# Altium PCB TestPCB.PcbDoc
Units mm, origin at the board's own origin, x right, y up, seen from the top; angles counter-clockwise.
Board outline 90 x 90 mm, 2 copper layers (Top Layer, Bottom Layer); 125 components, 111 nets, 387 pads, 0 vias.
Unrouted connection lines stored in the file: 262.
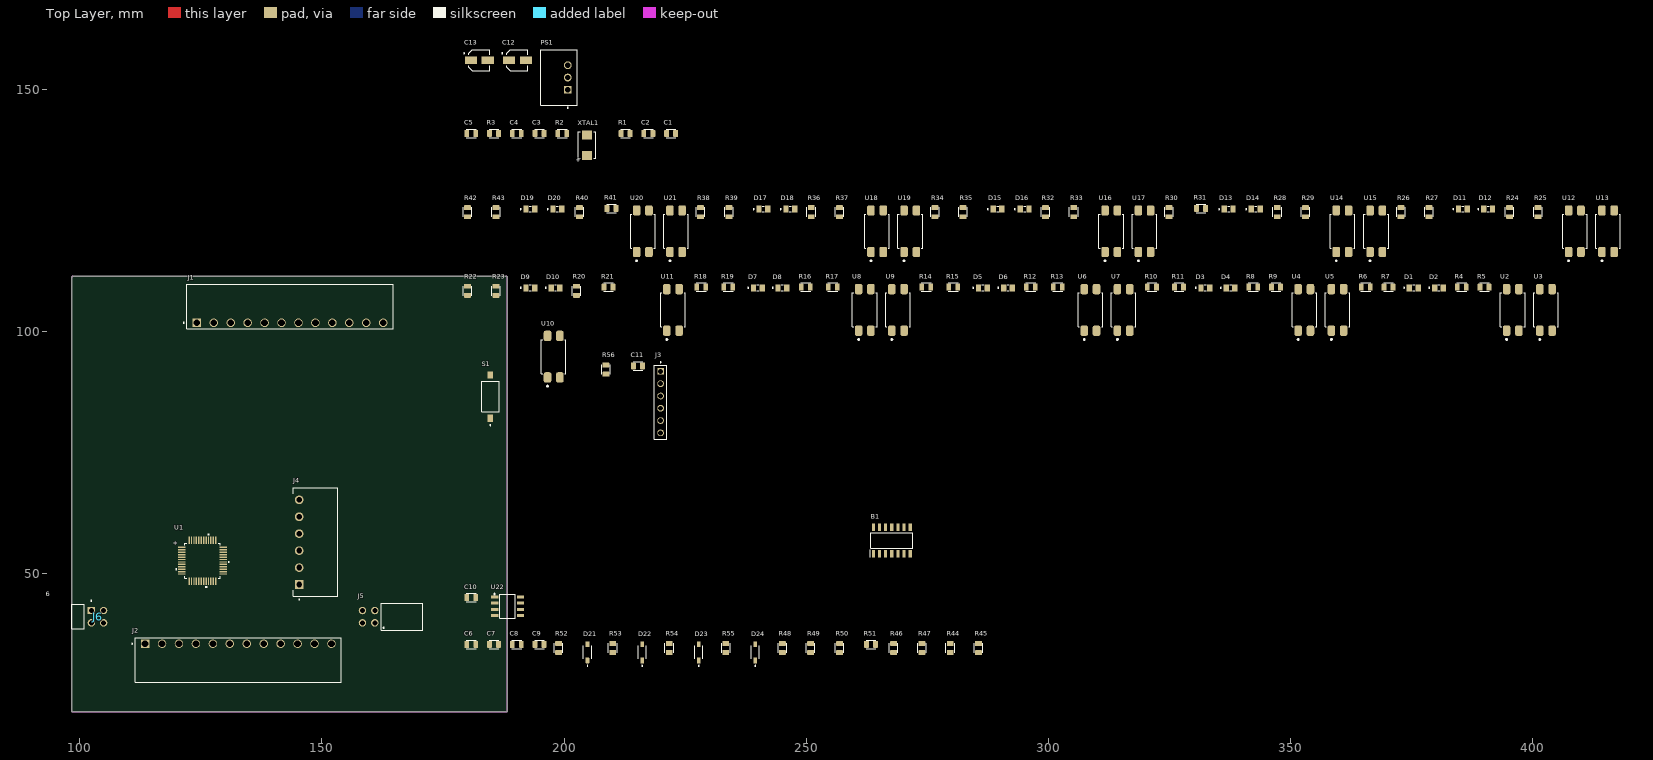
[diagram p0: Top Layer view]
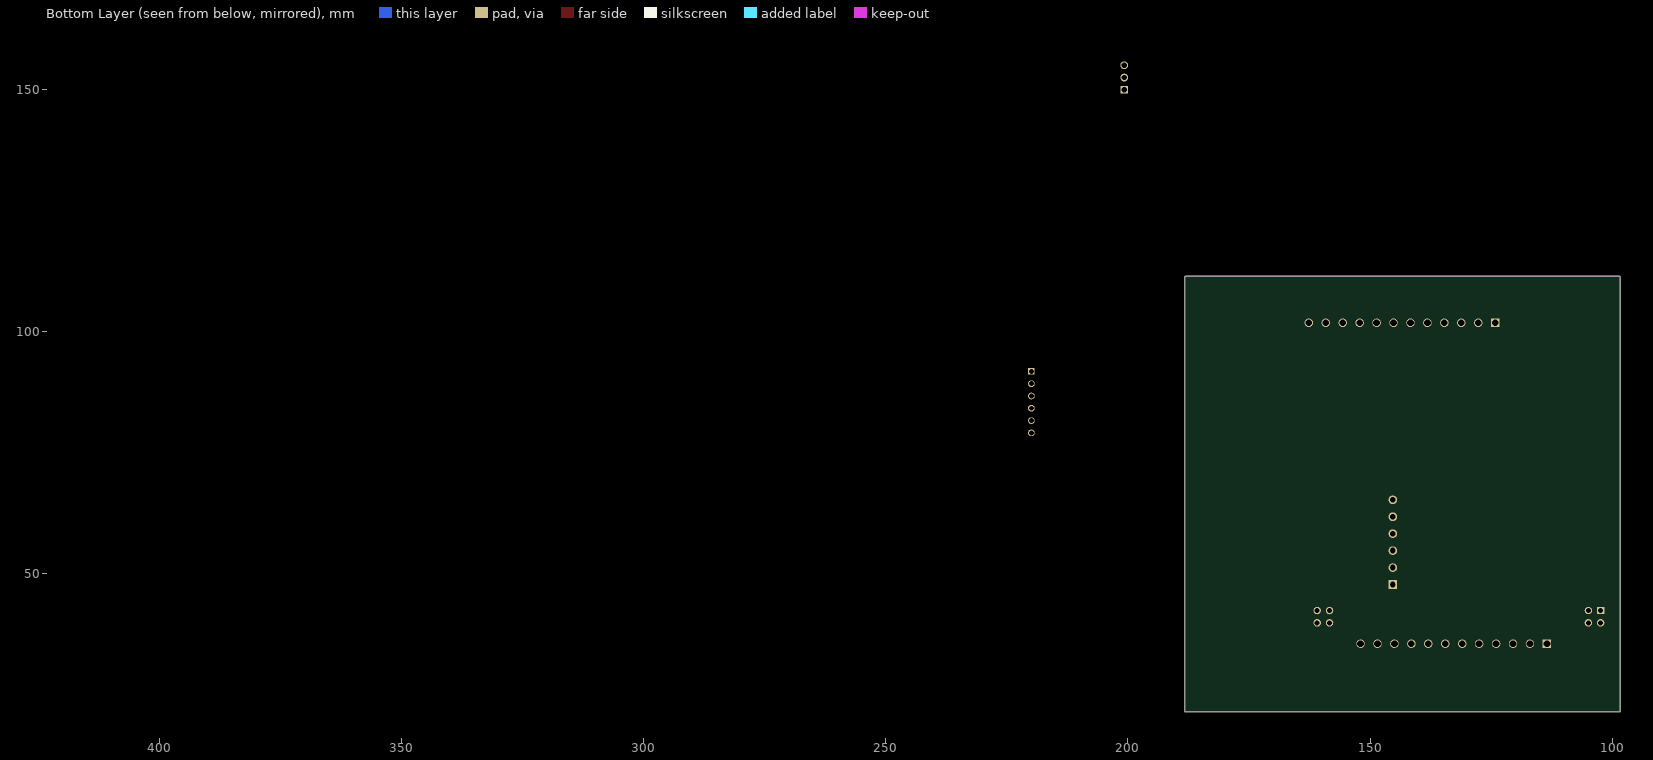
[diagram p1: Bottom Layer view, seen from below]

## Layer stack, top to bottom
Top Solder: solder mask 0.0102, Solder Resist, Dk 3.5
Top Layer: signal copper 0.0356
Dielectric 1: dielectric 0.32, FR-4, Dk 4.8
Bottom Layer: signal copper 0.0356
Bottom Solder: solder mask 0.0102, Solder Resist, Dk 3.5

## Board outline
98.298,21.717 98.298,111.209 cw(c98.552,111.209) 98.552,111.463 188.044,111.463 cw(c188.044,111.209) 188.298,111.209 188.298,21.717 cw(c188.044,21.717) 188.044,21.463 98.552,21.463 cw(c98.552,21.717)

## Design rules (kind name [scope] priority, off if disabled: settings)
Clearance [All] p1: gap=0.2 ignorepadtopadclearanceinfootprint=TRUE
DiffPairsRouting [All] p1: maxlimit=0.254 minlimit=0.254 mostfreqgap=0.254 toplayer_minwidth=0.381 toplayer_maxwidth=0.381 toplayer_prefwidth=0.381 bottomlayer_minwidth=0.381 bottomlayer_maxwidth=0.381 bottomlayer_prefwidth=0.381 maxuncoupledlength=12.7
HoleSize [All] p1: absolutevalues=TRUE maxlimit=6.3 minlimit=0.3 maxpercent=80.000 minpercent=20.000
HoleToHoleClearance [All] p1: gap=0.5 allowstackedmicrovias=TRUE
PolygonConnect [All] p1: connectstyle=Relief reliefconductorwidth=0.254 reliefentries=4 polygonreliefangle="90 Angle" airgapwidth=0.254
RoutingVias [All] p1: holewidth=0.711 width=1.27 viastyle="Through Hole" minholewidth=0.3 minwidth=0.5 maxholewidth=6.3 maxwidth=10
SilkToSilkClearance [All] p1: silktosilkclearance=0
SolderMaskExpansion [All] p1: expansion=0.102 istentingtop=FALSE
UnRoutedNet [All] p1: checkbadconnections=TRUE
Width [All] p1: maxlimit=5 minlimit=0.127 preferedwidth=0.5 minimp=50.000000 maximp=50.000000 favimp=50.000000
25 further rules are at their usual default settings.

## Classes and differential pairs
net class DO[9..0]: DO0 DO1 DO2 DO3 DO4 DO5 DO6 DO7 DO8 DO9
net class DI[9..0]: DI0 DI1 DI2 DI3 DI4 DI5 DI6 DI7 DI8 DI9
net class CDO[9..0]: CDO0 CDO1 CDO2 CDO3 CDO4 CDO5 CDO6 CDO7 CDO8 CDO9
net class CDI[9..0]: CDI0 CDI1 CDI2 CDI3 CDI4 CDI5 CDI6 CDI7 CDI8 CDI9
net class CAI[3..0]: CAI0 CAI1 CAI2 CAI3
net class ADC[2..0]: ADC0 ADC1 ADC2
component class Power: C12 C13 PS1
component class PIC18F56Q83: C1 C2 C3 C4 C5 R1 R2 R3 U1 XTAL1
component class "Digital Outputs": D11 D12 D13 D14 D15 D16 D17 D18 D19 D20 R24 R25 R26 R27 R28 R29 R30 R31 R32 R33 R34 R35 R36 R37 R38 R39 R40 R41 R42 R43 U12 U13 U14 U15 U16 U17 U18 U19 U20 U21
component class "Digital Inputs": D1 D2 D3 D4 D5 D6 D7 D8 D9 D10 R4 R5 R6 R7 R8 R9 R10 R11 R12 R13 R14 R15 R16 R17 R18 R19 R20 R21 R22 R23 U2 U3 U4 U5 U6 U7 U8 U9 U10 U11
component class Connectors: C11 J1 J2 J3 J4 J5 J6 R56 S1
component class "CAN Communication": C10 U22
component class "Analog Inputs": B1 C6 C7 C8 C9 D21 D22 D23 D24 R44 R45 R46 R47 R48 R49 R50 R51 R52 R53 R54 R55
differential pair CAN: +CAN_P -CAN_N

## Components (designator, comment, footprint, x,y, rotation, side; value= is the part's Value field where it differs from the comment)
B1 "OPA4991QDRQ1" OPA4991QDRQ1 267.716,56.896 r90 top
C1 "0.1uF" 0805 222.123,140.97 r0 top
C2 "20pF" 0805 217.424,140.97 r0 top
C3 "20pF" 0805 194.945,140.97 r0 top
C4 "0.1uF" 0805 190.246,140.97 r0 top
C5 "0.1uF" 0805 180.848,140.97 r0 top
C6 "0.1uF" 0805 180.848,35.433 r0 top
C7 "0.1uF" 0805 185.547,35.433 r0 top
C8 "0.1uF" 0805 190.246,35.433 r0 top
C9 "0.1uF" 0805 194.945,35.433 r0 top
C10 "0.1uF" 0805 180.848,45.085 r0 top
C11 "0.1uF" 0805 215.265,92.964 r0 top
C12 "47uF 4x5.4" "Electrolytic 4x5.4" 190.373,156.083 r0 top
C13 "47uF 4x5.4" "Electrolytic 4x5.4" 182.499,156.083 r0 top
D1 "LED 0805" "LED 0805" 375.539,109.093 r0 top
D2 "LED 0805" "LED 0805" 380.746,109.093 r0 top
D3 "LED 0805" "LED 0805" 332.486,109.093 r0 top
D4 "LED 0805" "LED 0805" 337.693,109.093 r0 top
D5 "LED 0805" "LED 0805" 286.512,109.093 r0 top
D6 "LED 0805" "LED 0805" 291.719,109.093 r0 top
D7 "LED 0805" "LED 0805" 240.03,109.093 r0 top
D8 "LED 0805" "LED 0805" 245.11,109.093 r0 top
D9 "LED 0805" "LED 0805" 193.04,109.093 r0 top
D10 "LED 0805" "LED 0805" 198.247,109.093 r0 top
D11 "LED 0805" "LED 0805" 385.699,125.349 r0 top
D12 "LED 0805" "LED 0805" 390.906,125.349 r0 top
D13 "LED 0805" "LED 0805" 337.312,125.349 r0 top
D14 "LED 0805" "LED 0805" 342.9,125.349 r0 top
D15 "LED 0805" "LED 0805" 289.56,125.349 r0 top
D16 "LED 0805" "LED 0805" 295.148,125.349 r0 top
D17 "LED 0805" "LED 0805" 241.173,125.349 r0 top
D18 "LED 0805" "LED 0805" 246.761,125.349 r0 top
D19 "LED 0805" "LED 0805" 193.04,125.349 r0 top
D20 "LED 0805" "LED 0805" 198.628,125.349 r0 top
D21 "5Vz" SOD123 204.851,33.782 r90 top
D22 "5Vz" SOD123 216.154,33.782 r90 top
D23 "5Vz" SOD123 227.838,33.782 r90 top
D24 "5Vz" SOD123 239.522,33.782 r90 top
J1 "12P - Right 3.5mm Industrial Connector" "12P - Right 3.5mm Industrial Connector" 124.146,101.854 r0 top
J2 "12P - Right 3.5mm Industrial Connector" "12P - Right 3.5mm Industrial Connector" 113.463,35.56 r0 top
J3 "6-POS 2.54mm Straight Header" "6-POS 2.54mm Header" 219.964,85.471 r90 top
J4 "6P - Right 3.5mm Industrial Connector" "6P - Right 3.5mm Industrial Connector" 153.288,45.343 r90 top
J5 "2x4-POS 2.54mm Female Header" "2x4-POS 2.54mm Female Header" 159.639,41.148 r90 top
J6 "2x4-POS 2.54mm Male Header" "2x4-POS 2.54mm Male Header" 103.632,41.148 r270 top
PS1 "R-78K5.0-0.5" CONV_R-78K5.0-0.5 199.009,152.527 r90 top
R1 "0805_Resistor" 0805 212.725,140.97 r0 top
R2 "10k" 0805 199.644,140.97 r0 top
R3 "100R" 0805 185.547,140.97 r0 top
R4 "1k" 0805 385.445,109.22 r0 top
R5 "1k" 0805 390.144,109.22 r0 top
R6 "1k" 0805 365.633,109.22 r0 top
R7 "1k" 0805 370.332,109.22 r0 top
R8 "1k" 0805 342.392,109.22 r0 top
R9 "1k" 0805 347.091,109.22 r0 top
R10 "1k" 0805 321.437,109.22 r0 top
R11 "1k" 0805 327.025,109.22 r0 top
R12 "1k" 0805 296.418,109.22 r0 top
R13 "1k" 0805 302.006,109.22 r0 top
R14 "1k" 0805 274.828,109.22 r0 top
R15 "1k" 0805 280.416,109.22 r0 top
R16 "1k" 0805 249.936,109.22 r0 top
R17 "1k" 0805 255.524,109.22 r0 top
R18 "1k" 0805 228.346,109.22 r0 top
R19 "1k" 0805 233.934,109.22 r0 top
R20 "1k" 0805 202.565,108.458 r90 top
R21 "1k" 0805 209.169,109.22 r0 top
R22 "1k" 0805 180.086,108.458 r90 top
R23 "1k" 0805 185.928,108.458 r90 top
R24 "220R" 0805 395.351,124.714 r90 top
R25 "220R" 0805 401.193,124.714 r90 top
R26 "1k" 0805 372.872,124.714 r90 top
R27 "1k" 0805 378.714,124.714 r90 top
R28 "220R" 0805 347.345,124.714 r90 top
R29 "220R" 0805 353.187,124.714 r90 top
R30 "1k" 0805 324.993,124.714 r90 top
R31 "1k" 0805 331.597,125.476 r0 top
R32 "220R" 0805 299.466,124.714 r90 top
R33 "220R" 0805 305.308,124.714 r90 top
R34 "1k" 0805 276.606,124.714 r90 top
R35 "1k" 0805 282.448,124.714 r90 top
R36 "220R" 0805 251.079,124.714 r90 top
R37 "220R" 0805 256.921,124.714 r90 top
R38 "1k" 0805 228.219,124.714 r90 top
R39 "1k" 0805 234.061,124.714 r90 top
R40 "220R" 0805 203.2,124.714 r90 top
R41 "220R" 0805 209.804,125.476 r0 top
R42 "1k" 0805 180.086,124.714 r90 top
R43 "1k" 0805 185.928,124.714 r90 top
R44 "100k" 0805 279.781,34.671 r90 top
R45 "100k" 0805 285.623,34.671 r90 top
R46 "100k" 0805 268.097,34.671 r90 top
R47 "100k" 0805 273.939,34.671 r90 top
R48 "10k" 0805 245.11,34.671 r90 top
R49 "10k" 0805 250.952,34.671 r90 top
R50 "10k" 0805 256.921,34.671 r90 top
R51 "10k" 0805 263.398,35.433 r0 top
R52 "10k" 0805 198.882,34.671 r90 top
R53 "10k" 0805 210.058,34.671 r90 top
R54 "10k" 0805 221.742,34.671 r90 top
R55 "10k" 0805 233.426,34.671 r90 top
R56 "120R" 0805 208.661,92.202 r90 top
S1 "DIP Switch 1 POS" "DIP Switch 1 POS" 184.785,86.614 r90 top
U1 "PIC18F56Q83-IPT" PIC18F56Q83-IPT 125.311,52.709 r0 top
U2 "PC817" PC817 395.986,104.521 r90 top
U3 "PC817" PC817 402.844,104.521 r90 top
U4 "PC817" PC817 352.933,104.521 r90 top
U5 "PC817" PC817 359.791,104.521 r90 top
U6 "PC817" PC817 308.737,104.521 r90 top
U7 "PC817" PC817 315.595,104.521 r90 top
U8 "PC817" PC817 262.128,104.521 r90 top
U9 "PC817" PC817 268.986,104.521 r90 top
U10 "PC817" PC817 197.866,94.869 r90 top
U11 "PC817" PC817 222.504,104.521 r90 top
U12 "PC817" PC817 408.813,120.777 r90 top
U13 "PC817" PC817 415.671,120.777 r90 top
U14 "PC817" PC817 360.807,120.777 r90 top
U15 "PC817" PC817 367.792,120.777 r90 top
U16 "PC817" PC817 313.055,120.777 r90 top
U17 "PC817" PC817 319.913,120.777 r90 top
U18 "PC817" PC817 264.668,120.777 r90 top
U19 "PC817" PC817 271.526,120.777 r90 top
U20 "PC817" PC817 216.281,120.777 r90 top
U21 "PC817" PC817 223.139,120.777 r90 top
U22 "MCP2562-E/SN" MCP2562-E/SN 188.341,43.307 r0 top
XTAL1 "8MHz" "Crystal 8MHz" 204.724,138.557 r90 top

## Footprints (in the part's own frame and the unit in brackets; to place one, negate y for a bottom-side part, rotate by r counter-clockwise, add the part's x,y. Pads: shape width x height; smd on the part's side, far side on the other; paste and mask are expansions set on the pad)
"2x4-POS 2.54mm Female Header" [mm]
  round 1.545 hole 1.03: 1(-1.27,-1.27) 2(-1.27,1.27) 3(1.27,-1.27) 4(1.27,1.27)
  silkscreen extent -2.79,-11.13 2.79,-2.63, body extent -2.79,-11.15 2.79,1.45, height 5.02
"2x4-POS 2.54mm Male Header" [mm]
  rect 1.53x1.53 / inner round 1.53 / far side rect 1.53x1.53 hole 1.02: 1(-1.27,-1.27)
  round 1.53 hole 1.02: 2(-1.27,1.27) 3(1.27,-1.27) 4(1.27,1.27)
  silkscreen extent -3.39,-5.33 2.54,-1.17, body extent -2.59,-11.18 2.49,1.59, height 6.15
"6-POS 2.54mm Header" [mm]
  rect 1.37x1.37 / inner round 1.37 / far side rect 1.37x1.37 hole 1.02: 01(6.35,0)
  round 1.37 hole 1.02: 02(3.81,0) 03(1.27,0) 04(-1.27,0) 05(-3.81,0) 06(-6.35,0)
  silkscreen extent -7.62,-1.27 8.37,1.27
"6P - Right 3.5mm Industrial Connector" [mm]
  rect 1.8x1.8 / inner round 1.8 / far side rect 1.8x1.8 hole 1.2: 01(2.45,8)
  round 1.8 hole 1.2: 02(5.95,8) 03(9.45,8) 04(12.95,8) 05(16.45,8) 06(19.95,8)
  silkscreen extent -0.75,0 22.4,9.2, body extent 0,-0.03 22.4,9.17, height 7.4
"12P - Right 3.5mm Industrial Connector" [mm] "12 Pin"
  rect 1.75x1.75 hole 1.4: 1(0,0)
  round 1.75 hole 1.4: 2(3.5,0) 3(7,0) 4(10.5,0) 5(14,0) 6(17.5,0) 7(21,0) 8(24.5,0) 9(28,0) 10(31.5,0) 11(35,0) 12(38.5,0)
  silkscreen extent -2.8,-1.2 40.55,8, body extent -2.06,-1.17 40.54,8.03, height 10.45
0805 [mm]
  rrect25% 1x1.42 smd: 1(-0.935,0) 2(0.935,0)
  silkscreen extent -1,-0.89 1,0.89, body extent -1,-0.63 1,0.63, height 0.6
CONV_R-78K5.0-0.5 [mm]
  rect 1.605x1.605 / inner round 1.605 / far side rect 1.605x1.605 hole 1.07: 1(-2.54,-1.775)
  round 1.605 hole 1.07: 2(0,-1.775) 3(2.54,-1.775)
  silkscreen extent -6.35,-3.77 5.75,3.77, body extent -5.75,-3.77 5.75,3.77, height 10.2
"Crystal 8MHz" [mil] "5032"
  rect 74x83 smd paste+0 mask+0: 1(-83.5,0) 2(83.5,0)
  silkscreen extent -108,-72 108,72
"DIP Switch 1 POS" [mm]
  rect 1.5x1.1 smd: 1(-4.45,0) 2(4.45,0)
  silkscreen extent -6.01,-1.79 3.15,1.79, body extent -4.9,-1.79 4.9,1.79, height 3.13
"Electrolytic 4x5.4" [mm]
  rect 2.5x1.6 smd: 1(-1.75,0) 2(1.75,0)
  silkscreen extent -3.25,-2.15 2.15,2.15, body extent -2.5,-2.15 2.5,2.15, height 5.78
"LED 0805" [mm]
  rect 1.1x1.45 smd: A(0.9,0) C(-0.9,0)
  silkscreen extent -2.1,-0.6 0.2,0.6, body extent -1,-0.63 1,0.63, height 0.7
MCP2562-E/SN [mm]
  rect 1.5x0.6 smd: 1(-2.65,1.905) 2(-2.65,0.635) 3(-2.65,-0.635) 4(-2.65,-1.905) 5(2.65,-1.905) 6(2.65,-0.635) 7(2.65,0.635) 8(2.65,1.905)
  silkscreen extent -2.84,-2.45 1.58,2.64
OPA4991QDRQ1 [mm]
  rect 1.525x0.65 smd: 1(-2.712,3.81) 2(-2.712,2.54) 3(-2.712,1.27) 4(-2.712,0) 5(-2.712,-1.27) 6(-2.712,-2.54) 7(-2.712,-3.81) 8(2.712,-3.81) 9(2.712,-2.54) 10(2.712,-1.27) 11(2.712,0) 12(2.712,1.27) 13(2.712,2.54) 14(2.712,3.81)
  silkscreen extent -3.47,-4.33 1.6,4.48, body extent -3.14,-4.33 2.89,4.33, height 1.75
PC817 [mm]
  rrect50% 2.13x1.57 smd: 1(-4.29,1.27) 2(-4.29,-1.27) 3(4.29,-1.27) 4(4.29,1.27)
  silkscreen extent -6.25,-2.54 3.5,2.54, body extent -4.87,-2.29 4.87,2.29, height 4
PIC18F56Q83-IPT [mil]
  rect 61x11 smd paste+0 mask+0: 1(-168.5,108.27) 2(-168.5,88.58) 3(-168.5,68.9) 4(-168.5,49.21) 5(-168.5,29.53) 6(-168.5,9.84) 7(-168.5,-9.84) 8(-168.5,-29.53) 9(-168.5,-49.21) 10(-168.5,-68.9) 11(-168.5,-88.58) 12(-168.5,-108.27) 25(168.5,-108.27) 26(168.5,-88.58) 27(168.5,-68.9) 28(168.5,-49.21) 29(168.5,-29.53) 30(168.5,-9.84) 31(168.5,9.84) 32(168.5,29.53) 33(168.5,49.21) 34(168.5,68.9) 35(168.5,88.58) 36(168.5,108.27)
  rect 11x61 smd paste+0 mask+0: 13(-108.27,-168.5) 14(-88.58,-168.5) 15(-68.9,-168.5) 16(-49.21,-168.5) 17(-29.53,-168.5) 18(-9.84,-168.5) 19(9.84,-168.5) 20(29.53,-168.5) 21(49.21,-168.5) 22(68.9,-168.5) 23(88.58,-168.5) 24(108.27,-168.5) 37(108.27,168.5) 38(88.58,168.5) 39(68.9,168.5) 40(49.21,168.5) 41(29.53,168.5) 42(9.84,168.5) 43(-9.84,168.5) 44(-29.53,168.5) 45(-49.21,168.5) 46(-68.9,168.5) 47(-88.58,168.5) 48(-108.27,168.5)
  silkscreen extent -219,-219 219,219, body extent -177,-177 177,177, height 47
SOD123 [mm]
  rrect18% 1.21x0.73 smd: 1(1.68,0) 2(-1.68,0)
  silkscreen extent -2.9,-0.85 1.35,0.85, body extent -1.83,-0.77 1.83,0.77, height 1.45

## Part data
B1: "Operational Amplifiers - Op Amps Automotive-grade, quad, 40-V, 4.5-MHz, low-power operational amplifier", Manufacturer_Name="Texas Instruments", Mouser Part Number=595-OPA4991QDRQ1, Datasheet Link=https://www.ti.com/lit/ds/symlink/opa4991-q1.pdf?ts=1681108583924&ref_url=https%253A%252F%252Fwww.ti.com%252Fsitesearch%252Fen-us%252Fdocs%252Funiversalsearch.tsp%253FlangPref%253Den-US%2526searchTerm%253DOPA4991QDRQ1%2526nr%253D8, Geometry.Height=1.75mm, Manufacturer_Part_Number=OPA4991QDRQ1, Mouser Price/Stock=https://www.mouser.co.uk/ProductDetail/Texas-Instruments/OPA4991QDRQ1?qs=Rp5uXu7WBW8O3FoPRuKIAQ%3D%3D
C1 C2 C3 C4 C5 C6 C7 C8 C9 C10 C11: library part 0805_Capacitor, Package="0805 AVX", Availability="In Stock", Check_prices=https://www.snapeda.com/parts/LD051A121KAB2A/AVX/view-part/?ref=eda, MF=AVX, MP=LD051A121KAB2A, Price=None, Purchase-URL=https://pricing.snapeda.com/search/part/LD051A121KAB2A/?ref=eda, SnapEDA_Link=https://www.snapeda.com/parts/LD051A121KAB2A/AVX/view-part/?ref=snap
C12 C13: library part "Electrolytic 4x5.4", Package="RADIAL-2 Panasonic", Availability="In Stock", Check_prices=https://www.snapeda.com/parts/EEE-HA1E100WR/Panasonic/view-part/778519/?ref=eda, MF=Panasonic, MP=EEE-HA1E100WR, Price=None, Purchase-URL=https://pricing.snapeda.com/search/part/EEE-HA1E100WR/?ref=eda, SnapEDA_Link=https://www.snapeda.com/parts/EEE-HA1E100WR/Panasonic/view-part/778519/?ref=snap
D1 D2 D3 D4 D5 D6 D7 D8 D9 D10 D11 D12 D13 D14 D15 D16 D17 D18 D19 D20: "LED Uni-Color Green 4-Pin Chip 0805 T/R", Package=None, Availability=Unavailable, MP=597-3305-607F, Price=None
D21 D22 D23 D24: library part "SOD123 - Zener Diode", Package="SMA-2 Taiwan Semiconductor", Availability="In Stock", Check_prices=https://www.snapeda.com/parts/1SMA5926/Taiwan+Semiconductor/view-part/?ref=eda, MF="Taiwan Semiconductor", MP=1SMA5926, Price=None, Purchase-URL=https://pricing.snapeda.com/search/part/1SMA5926/?ref=eda, SnapEDA_Link=https://www.snapeda.com/parts/1SMA5926/Taiwan+Semiconductor/view-part/?ref=snap
J1 J2: "12 Pin", Package=None, Availability=Unavailable, MP=1-2350514-2, Price=None
J3: "HEADER, 6 CONTACTS, 1 ROW, THROUGH HOLE, 2.54 MM; Connector Systems:Board-to-Board; Pitch Spacing:2.54mm; No. of Rows:1Rows; No. of Contacts:6Contacts; Contact Termination Type:Through Hole Right Angle; Product Range:HTSW Series RoHS Compliant: Yes", Package=None, Availability="In Stock", Check_prices=https://www.snapeda.com/parts/HTSW10608SSLA/Samtec/view-part/?ref=eda, MF=Samtec, MP=HTSW10608SSLA, Price=None, Purchase-URL=https://pricing.snapeda.com/search/part/HTSW10608SSLA/?ref=eda, SnapEDA_Link=https://www.snapeda.com/parts/HTSW10608SSLA/Samtec/view-part/?ref=snap
J4 J5 J6 S1: Package=None, Price=None
  J4: Availability="In Stock", Check_prices=https://www.snapeda.com/parts/HTSW10608SSLA/Samtec/view-part/?ref=eda, MF=Samtec, MP=HTSW10608SSLA, Purchase-URL=https://pricing.snapeda.com/search/part/HTSW10608SSLA/?ref=eda, SnapEDA_Link=https://www.snapeda.com/parts/HTSW10608SSLA/Samtec/view-part/?ref=snap
  J5 J6: Availability=Unavailable, Check_prices=https://www.snapeda.com/parts/613004243121/W%C3%BCrth%20Elektronik/view-part/1737074/?ref=eda, MF="WÃ¼rth Elektronik", MP=613004243121, SnapEDA_Link=https://www.snapeda.com/parts/613004243121/W%C3%BCrth%20Elektronik/view-part/1737074/?ref=snap
  S1: Availability="In Stock", Check_prices=https://www.snapeda.com/parts/KAE01SGGT/E-Switch/view-part/?ref=eda, MF=E-Switch, MP=KAE01SGGT, Purchase-URL=https://pricing.snapeda.com/search/part/KAE01SGGT/?ref=eda, SnapEDA_Link=https://www.snapeda.com/parts/KAE01SGGT/E-Switch/view-part/?ref=snap
PS1: "0.5A DC/DC-Converter 'INNOLINE' SIP3 reg", Package=None, Availability="In Stock", Check_prices=https://www.snapeda.com/parts/R-78K5.0-0.5/Recom+Power/view-part/?ref=eda, MF="Recom Power", MP=R-78K5.0-0.5, Price=None, Purchase-URL=https://pricing.snapeda.com/search/part/R-78K5.0-0.5/?ref=eda, SnapEDA_Link=https://www.snapeda.com/parts/R-78K5.0-0.5/Recom+Power/view-part/?ref=snap
R1: Package=0805, Power_Rating=".25 W", Resistance=.33, Tolerance=1%, Availability="In Stock", Check_prices=https://www.snapeda.com/parts/2-2176053-0/TE+Connectivity/view-part/?ref=eda, EU_RoHS_Compliance="Compliant with Exemptions", MF="TE Connectivity", MP=2-2176053-0, Price=None, SnapEDA_Link=https://www.snapeda.com/parts/2-2176053-0/TE+Connectivity/view-part/?ref=snap
R2 R3 R4 R5 R6 R7 R8 R9 R10 R11 R12 R13 R14 R15 R16 R17 R18 R19 R20 R21 R22 R23 R24 R25 R26 R27 R28 R29 R30 R31 R32 R33 R34 R35 R36 R37 R38 R39 R40 R41 R42 R43 R44 R45 R46 R47 R48 R49 R50 R51 R52 R53 R54 R55 R56: library part 0805_Resistor, Package=0805, Power_Rating=".25 W", Resistance=.33, Tolerance=1%, Availability="In Stock", Check_prices=https://www.snapeda.com/parts/2-2176053-0/TE+Connectivity/view-part/?ref=eda, EU_RoHS_Compliance="Compliant with Exemptions", MF="TE Connectivity", MP=2-2176053-0, Price=None, SnapEDA_Link=https://www.snapeda.com/parts/2-2176053-0/TE+Connectivity/view-part/?ref=snap
U1: "No Description Available", Mfr_Name=Microchip, RefDes=RefDes, Type=Type
U2 U3 U4 U5 U6 U7 U8 U9 U10 U11 U12 U13 U14 U15 U16 U17 U18 U19 U20 U21: "Optoisolator Transistor Output 5000Vrms 1 Channel 4-SMD", Package="SMD-4 Sharp Microelectronics", Availability="In Stock", Check_prices=https://www.snapeda.com/parts/PC817XI/Sharp+Microelectronics/view-part/?ref=eda, MF="Sharp Microelectronics", MP=PC817XI, Price=None, Purchase-URL=https://pricing.snapeda.com/search/part/PC817XI/?ref=eda, SnapEDA_Link=https://www.snapeda.com/parts/PC817XI/Sharp+Microelectronics/view-part/?ref=snap
U22: "1/1 Transceiver Half CANbus 8-SOIC", Package="SO-8 Microchip", Availability=Unavailable, MF=Microchip, MP=MCP2562-E/SN, Price=None, SnapEDA_Link=https://www.snapeda.com/parts/MCP2562-E/SN/Microchip/view-part/1055306/?ref=snap
XTAL1: library part "Crystal 8MHz", "5032", Manufacturer_Part_Number=SC32A-12.5PF20PPM, Mfr_Name=Epson, Copyright="Copyright (C) 2024 Ultra Librarian. All rights reserved.", RefDes=RefDes, Type=DEV

## Nets (pads, with @x,y where several pads share a name; then routed paths per layer and width w, separated by ;. In a path a pad name is that pad's centre, name@x,y a point inside that pad or via, vN(x,y) a via of type N, cw(c..) or ccw(c..) an arc to the next point about the centre after c; other vN are vias at no path point)
+5: C1.1 C4.1 C10.2 C11.1 C12.1 J3.02 PS1.3 R2.2 U1.7 U1.30 U2.4 U3.4 U4.4 U5.4 U6.4 U7.4 U8.4 U9.4 U10.4 U11.4 U22.3 U22.5
+24: B1.4 C13.1 J1.11 J2.11 J4.05 J5.2 J6.4 PS1.1 U12.4 U13.4 U14.4 U15.4 U16.4 U17.4 U18.4 U19.4 U20.4 U21.4
ABO0: B1.1 B1.2 R48.2
ABO1: B1.6 B1.7 R49.2
ABO2: B1.13 B1.14 R50.2
ABO3: B1.8 B1.9 R51.2
ADC0: U1.48
ADC1: U1.47
ADC2: U1.46
ADC3: C9.2 D24.1 R51.1 R55.2 U1.21
CAI0: B1.3 J4.01 R44.1
CAI1: B1.5 J4.02 R46.2
CAI2: B1.10 J4.03 R47.2
CAI3: B1.12 J4.04 R45.2
CAN_N: J5.3 J6.1 S1.2 U22.6
CAN_P: J5.1 J6.3 R56.2 U22.7
CDI0: J1.1 R4.1
CDI1: J1.2 R8.1
CDI2: J1.3 R12.1
CDI3: J1.4 R16.1
CDI4: J1.5 R20.1
CDI5: J1.6 R21.1
CDI6: J1.7 R17.1
CDI7: J1.8 R13.1
CDI8: J1.9 R9.1
CDI9: J1.10 R5.1
CDO0: D11.A J2.1 U12.3
CDO1: D13.A J2.2 U14.3
CDO2: D15.A J2.3 U16.3
CDO3: D17.A J2.4 U18.3
CDO4: D19.A J2.5 U20.3
CDO5: D20.A J2.6 U21.3
CDO6: D18.A J2.7 U19.3
CDO7: D16.A J2.8 U17.3
CDO8: D14.A J2.9 U15.3
CDO9: D12.A J2.10 U13.3
DI0: D1.A U1.22 U2.3
DI1: D3.A U1.23 U4.3
DI2: D5.A U1.24 U6.3
DI3: D7.A U1.29 U8.3
DI4: D9.A U1.28 U10.3
DI5: D10.A U1.27 U11.3
DI6: D8.A U1.26 U9.3
DI7: D6.A U1.25 U7.3
DI8: D4.A U1.35 U5.3
DI9: D2.A U1.34 U3.3
DO0: R24.1 U1.45
DO1: R28.1 U1.44
DO2: R32.1 U1.43
DO3: R36.1 U1.42
DO4: R40.1 U1.41
DO5: R41.1 U1.40
DO6: R37.1 U1.39
DO7: R33.1 U1.38
DO8: R29.1 U1.37
DO9: R25.1 U1.36
GND: B1.11 C1.2 C2.2 C3.2 C4.2 C5.1 C6.1 C7.1 C8.1 C9.1 C10.1 C11.2 C12.2 C13.2 D21.2 D22.2 D23.2 D24.2 J3.03 J5.4 J6.2 PS1.2 R6.1 R7.1 R10.1 R11.1 R14.1 R15.1 R18.1 R19.1 R22.1 R23.1 R44.2 R45.1 R46.1 R47.1 R52.1 R53.1 R54.1 R55.1 U1.6 U1.31 U12.2 U13.2 U14.2 U15.2 U16.2 U17.2 U18.2 U19.2 U20.2 U21.2 U22.2 U22.8
GND2: J1.12 J2.12 J4.06 R26.1 R27.1 R30.1 R31.1 R34.1 R35.1 R38.1 R39.1 R42.1 R43.1 U2.2 U3.2 U4.2 U5.2 U6.2 U7.2 U8.2 U9.2 U10.2 U11.2
NetC2_1: C2.1 R1.2 XTAL1.2
NetC3_1: C3.1 U1.32 XTAL1.1
NetC5_2: C5.2 R2.1 R3.2
NetC6_2: C6.2 D21.1 R48.1 R52.2
NetC7_2: C7.2 D22.1 R49.1 R53.2
NetC8_2: C8.2 D23.1 R50.1 R54.2
NetD1_C: D1.C R6.2
NetD2_C: D2.C R7.2
NetD3_C: D3.C R10.2
NetD4_C: D4.C R11.2
NetD5_C: D5.C R14.2
NetD6_C: D6.C R15.2
NetD7_C: D7.C R18.2
NetD8_C: D8.C R19.2
NetD9_C: D9.C R22.2
NetD10_C: D10.C R23.2
NetD11_C: D11.C R26.2
NetD12_C: D12.C R27.2
NetD13_C: D13.C R30.2
NetD14_C: D14.C R31.2
NetD15_C: D15.C R34.2
NetD16_C: D16.C R35.2
NetD17_C: D17.C R38.2
NetD18_C: D18.C R39.2
NetD19_C: D19.C R42.2
NetD20_C: D20.C R43.2
NetJ3_01: J3.01 R3.1 U1.20
NetJ3_04: J3.04 U1.19
NetJ3_05: J3.05 U1.18
NetR1_1: R1.1 U1.33
NetR4_2: R4.2 U2.1
NetR5_2: R5.2 U3.1
NetR8_2: R8.2 U4.1
NetR9_2: R9.2 U5.1
NetR12_2: R12.2 U6.1
NetR13_2: R13.2 U7.1
NetR16_2: R16.2 U8.1
NetR17_2: R17.2 U9.1
NetR20_2: R20.2 U10.1
NetR21_2: R21.2 U11.1
NetR24_2: R24.2 U12.1
NetR25_2: R25.2 U13.1
NetR28_2: R28.2 U14.1
NetR29_2: R29.2 U15.1
NetR32_2: R32.2 U16.1
NetR33_2: R33.2 U17.1
NetR36_2: R36.2 U18.1
NetR37_2: R37.2 U19.1
NetR40_2: R40.2 U20.1
NetR41_2: R41.2 U21.1
NetR56_1: R56.1 S1.1
NetU1_8: U1.8 U22.4
NetU1_9: U1.9 U22.1
pads on no net: J3.06 U1.1 U1.2 U1.3 U1.4 U1.5 U1.10 U1.11 U1.12 U1.13 U1.14 U1.15 U1.16 U1.17

## Keep-outs
Keep-Out Layer:
  the board outline again, w0.18

## Text inside footprints (layer, text, board x,y; h text height)
J6: Mechanical 13 "PCB Edge" at 98.432,38.138 h1.02 r270
U1: Top Overlay "*" at 119.304,55.455 h1.27; Mechanical 13 "*" at 121.869,55.074 h1.27
XTAL1: Top Overlay "*" at 203.746,135.001 h1.27 r90; Mechanical 13 "*" at 204.381,136.271 h1.27 r90